# EAGLE board led_dimmer_8ch (EAGLE 9.6.2)
8-Channel LED Dimmer PCB - 100mm x 80mm
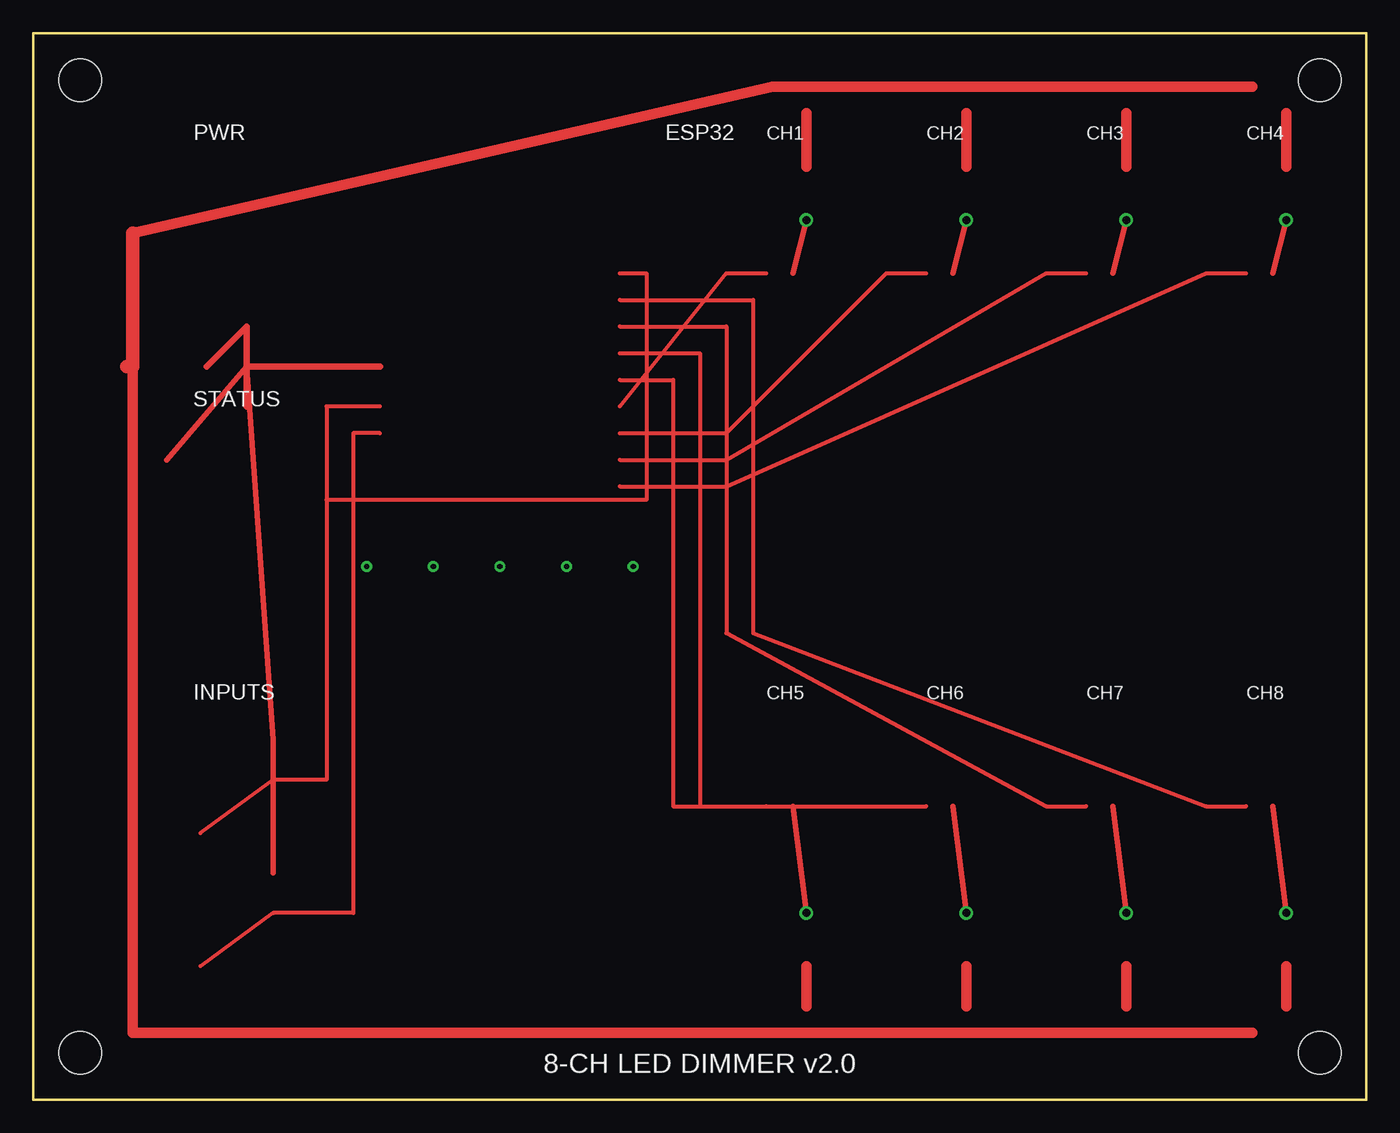
[diagram p0: board, top side]
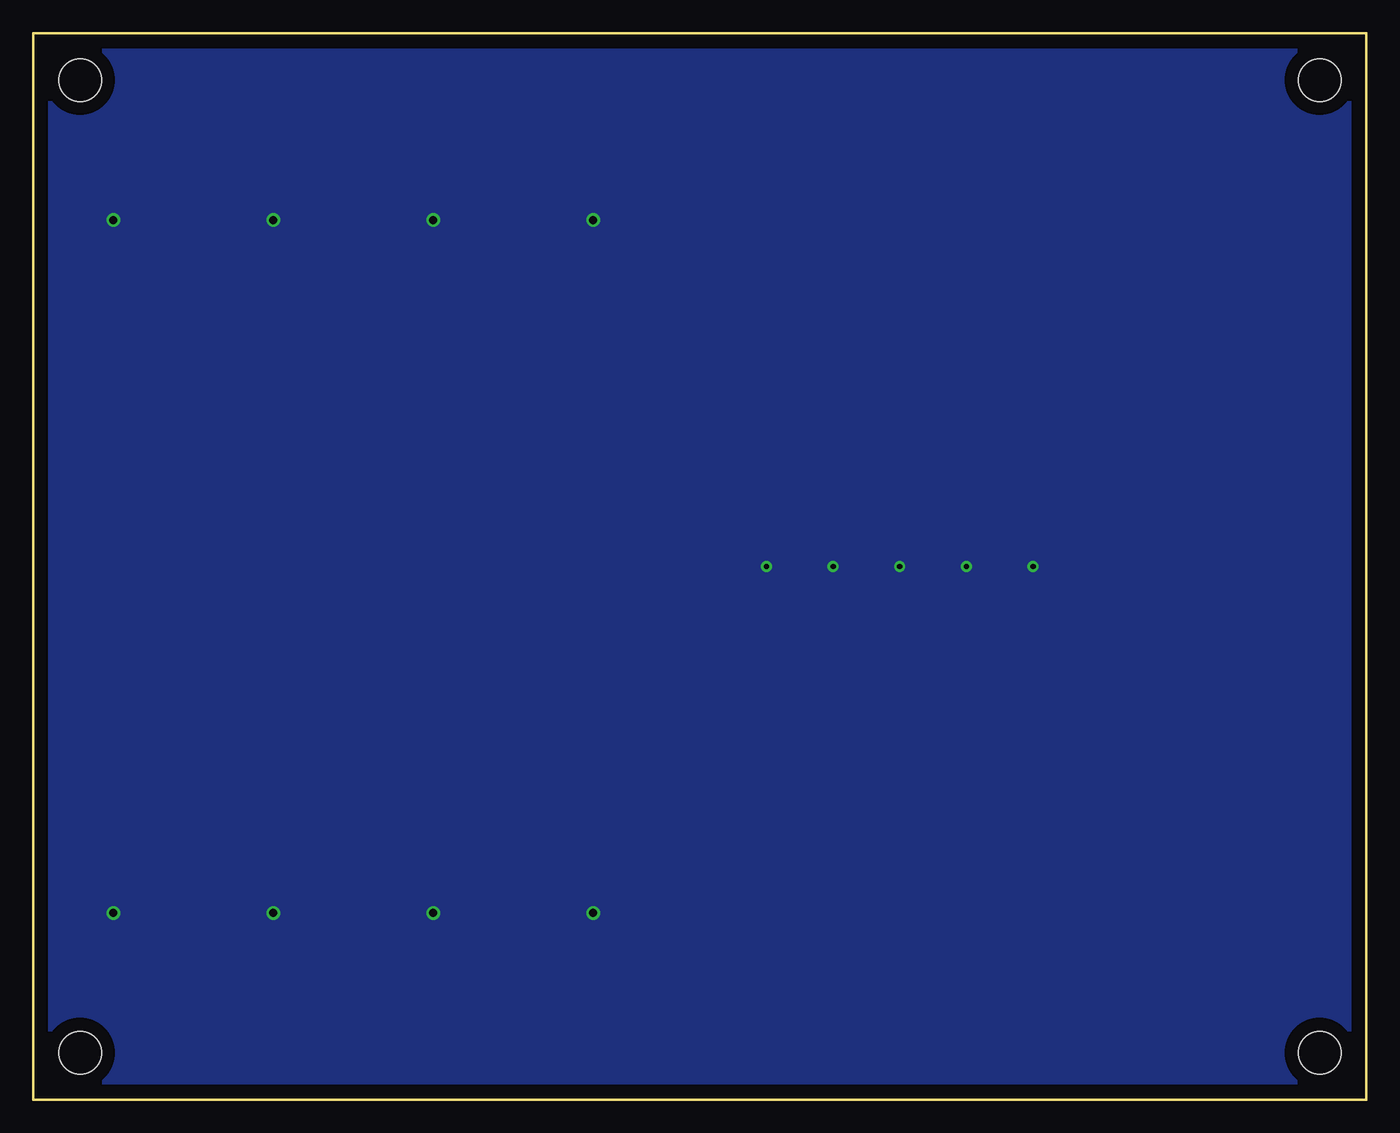
[diagram p1: board, bottom side, seen from below]

Size 100 x 80 mm. Coordinates in mm from the lower left corner, seen from the top.
Outline: 0,0 100,0 100,80 0,80 0,0
Copper layers used: Top, Bottom
Holes 3.2 mm at 3.5,3.5 96.5,3.5 3.5,76.5 96.5,76.5

## Placement (x,y rotation side)
C1  100nF  [0805]  16,58 0 top
C2  10uF  [0805]  16,52 0 top
C3  100nF  [0805]  18,45 0 top
D1  WS2812B  [5050-LED]  10,45 0 top
J1  PWR_IN  [SCREWTERMINAL-2]  10,65 0 top
J2  CH1  [SCREWTERMINAL-2]  58,76 0 top
J3  CH2  [SCREWTERMINAL-2]  70,76 0 top
J4  CH3  [SCREWTERMINAL-2]  82,76 0 top
J5  CH4  [SCREWTERMINAL-2]  94,76 0 top
J6  BTN1  [SCREWTERMINAL-2]  10,20 0 top
J7  BTN2  [SCREWTERMINAL-2]  10,10 0 top
J8  CH5  [SCREWTERMINAL-2]  58,5 0 top
J9  CH6  [SCREWTERMINAL-2]  70,5 0 top
J10  CH7  [SCREWTERMINAL-2]  82,5 0 top
J11  CH8  [SCREWTERMINAL-2]  94,5 0 top
Q1  IRLZ44N  [TO220]  58,68 180 top
Q2  IRLZ44N  [TO220]  70,68 180 top
Q3  IRLZ44N  [TO220]  82,68 180 top
Q4  IRLZ44N  [TO220]  94,68 180 top
Q5  IRLZ44N  [TO220]  58,12 0 top
Q6  IRLZ44N  [TO220]  70,12 0 top
Q7  IRLZ44N  [TO220]  82,12 0 top
Q8  IRLZ44N  [TO220]  94,12 0 top
R1  100R  [0805]  55,62 0 top
R2  100R  [0805]  67,62 0 top
R3  100R  [0805]  79,62 0 top
R4  100R  [0805]  91,62 0 top
R5  100R  [0805]  55,22 0 top
R6  100R  [0805]  67,22 0 top
R7  100R  [0805]  79,22 0 top
R8  100R  [0805]  91,22 0 top
R9  10K  [0805]  55,58 90 top
R10  10K  [0805]  67,58 90 top
R11  10K  [0805]  79,58 90 top
R12  10K  [0805]  91,58 90 top
R13  10K  [0805]  55,18 90 top
R14  10K  [0805]  67,18 90 top
R15  10K  [0805]  79,18 90 top
R16  10K  [0805]  91,18 90 top
R17  10K  [0805]  18,24 90 top
R18  10K  [0805]  18,14 90 top
U1  ESP32-WROOM-32  [ESP32-WROOM-32]  35,50 0 top
U2  AMS1117-3.3  [SOT223]  10,55 90 top

## Library data of the parts
C1-C3 D1 J1-J11 Q1-Q8 R1-R18 U1 U2 = led_dimmer

## Tracks (layer width: path | path; a pad name or v marks a point on that pad's centre or on a via)
3V3
  Top 0.4: 10,48 16,55 18,27 18,17
  Top 0.5: 13,55 16,58 16,52 | 16,55 26,55
BTN1
  Top 0.3: 26,52 22,52 22,24 18,24 12.54,20
BTN2
  Top 0.3: 26,50 24,50 24,14 18,14 12.54,10
GATE1
  Top 0.4: 57,62 58,66
GATE2
  Top 0.4: 69,62 70,66
GATE3
  Top 0.4: 81,62 82,66
GATE4
  Top 0.4: 93,62 94,66
GATE5
  Top 0.4: 57,22 58,14
GATE6
  Top 0.4: 69,22 70,14
GATE7
  Top 0.4: 81,22 82,14
GATE8
  Top 0.4: 93,22 94,14
GND  (via drill 0.4, 0.6)
  other vias: 25,40 30,40 35,40 40,40 45,40 58,66 70,66 82,66 94,66 58,14 70,14 82,14 94,14
  pour Bottom: 0.5,0.5 99.5,0.5 99.5,79.5 0.5,79.5
LED1_OUT
  Top 0.8: 58,70 58,74
LED2_OUT
  Top 0.8: 70,70 70,74
LED3_OUT
  Top 0.8: 82,70 82,74
LED4_OUT
  Top 0.8: 94,70 94,74
LED5_OUT
  Top 0.8: 58,10 58,7
LED6_OUT
  Top 0.8: 70,10 70,7
LED7_OUT
  Top 0.8: 82,10 82,7
LED8_OUT
  Top 0.8: 94,10 94,7
PWM_CH1
  Top 0.3: 44,52 52,62 55,62
PWM_CH2
  Top 0.3: 44,50 52,50 64,62 67,62
PWM_CH3
  Top 0.3: 44,48 52,48 76,62 79,62
PWM_CH4
  Top 0.3: 44,46 52,46 88,62 91,62
PWM_CH5
  Top 0.3: 44,54 48,54 48,22 55,22
PWM_CH6
  Top 0.3: 44,56 50,56 50,22 67,22
PWM_CH7
  Top 0.3: 44,58 52,58 52,35 76,22 79,22
PWM_CH8
  Top 0.3: 44,60 54,60 54,35 88,22 91,22
VIN
  Top 0.8: 91.46,76 79.46,76 67.46,76 55.46,76 7.46,65 7.46,5 55.46,5 67.46,5 79.46,5 91.46,5
  Top 1: 7.46,65 7.46,55 7,55
WS2812_DIN
  Top 0.3: 44,62 46,62 46,45 22,45

## Text on the board
tPlace: PWR | ESP32 | CH1 | CH2 | CH3 | CH4 | STATUS | INPUTS | CH5 | CH6 | CH7 | CH8 | 8-CH LED DIMMER v2.0